# Altium PCB SterUni_V1.PcbDoc
Units mil, origin at the board's own origin, x right, y up, seen from the top; angles counter-clockwise.
Board outline 4448.82 x 3661.42 mil, 2 copper layers (Top Layer, Bottom Layer); 255 components, 211 nets, 795 pads, 11 vias.
Unrouted connection lines stored in the file: 376.
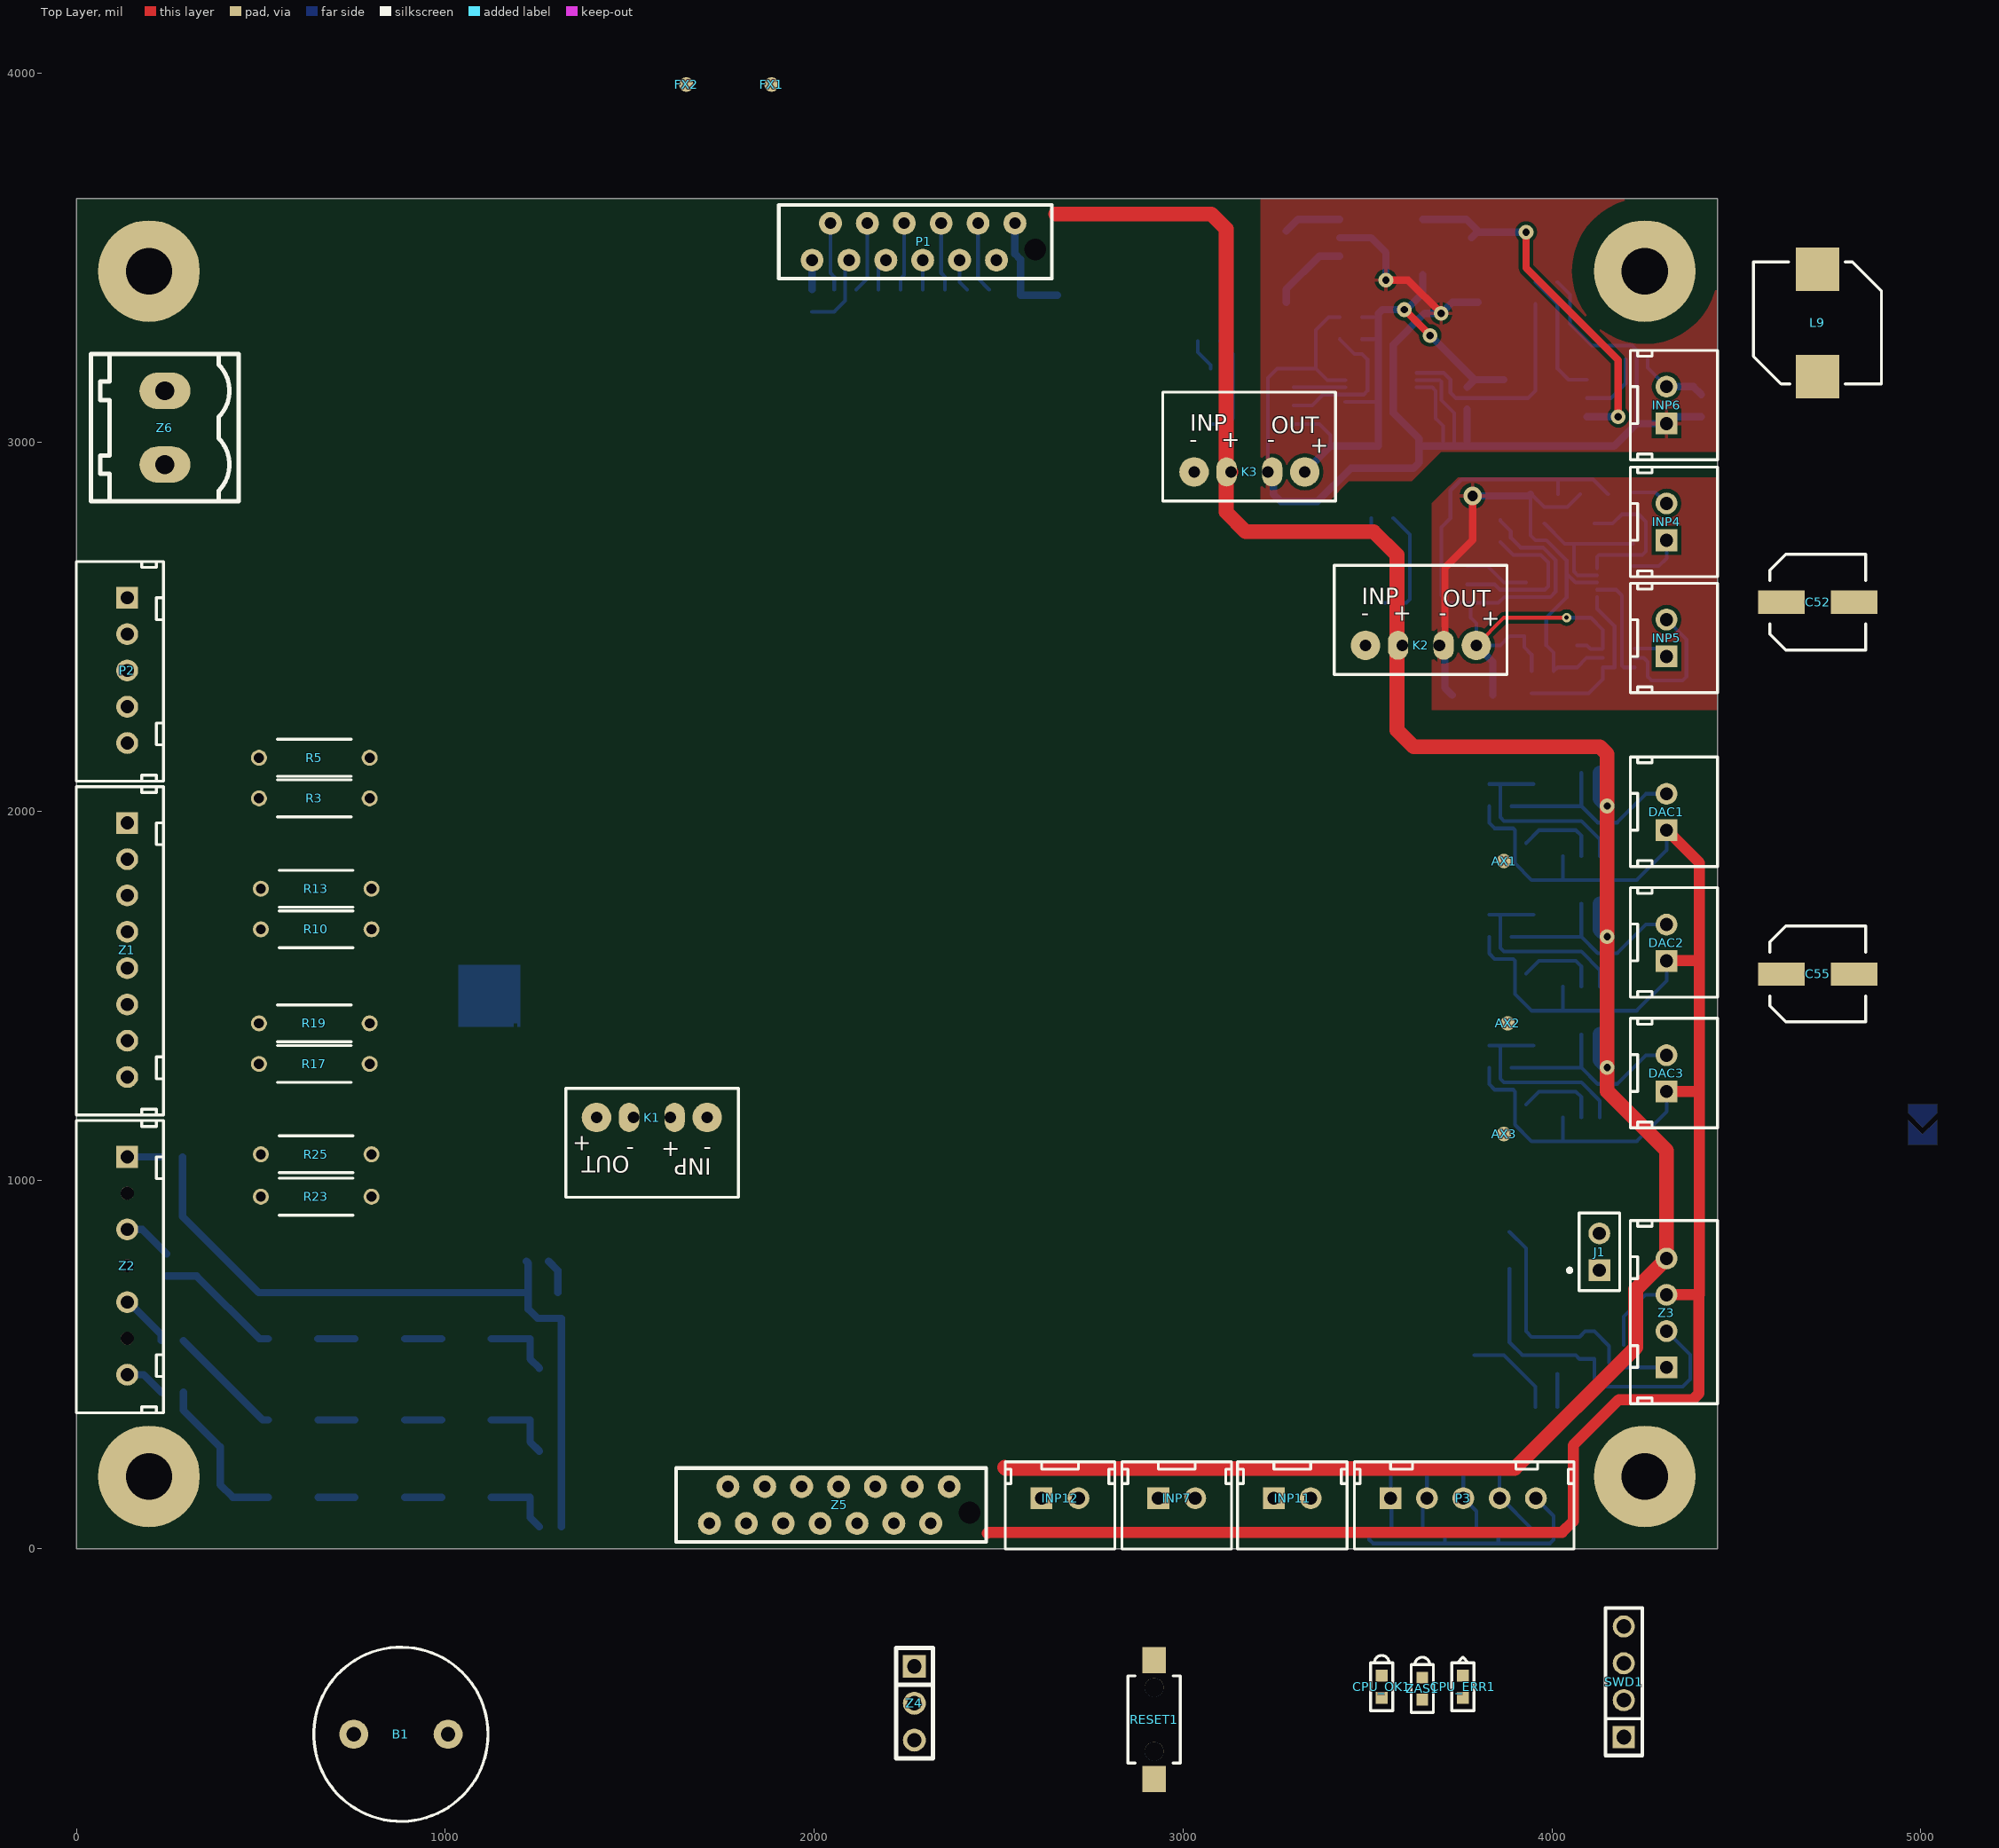
[diagram p0: Top Layer view]
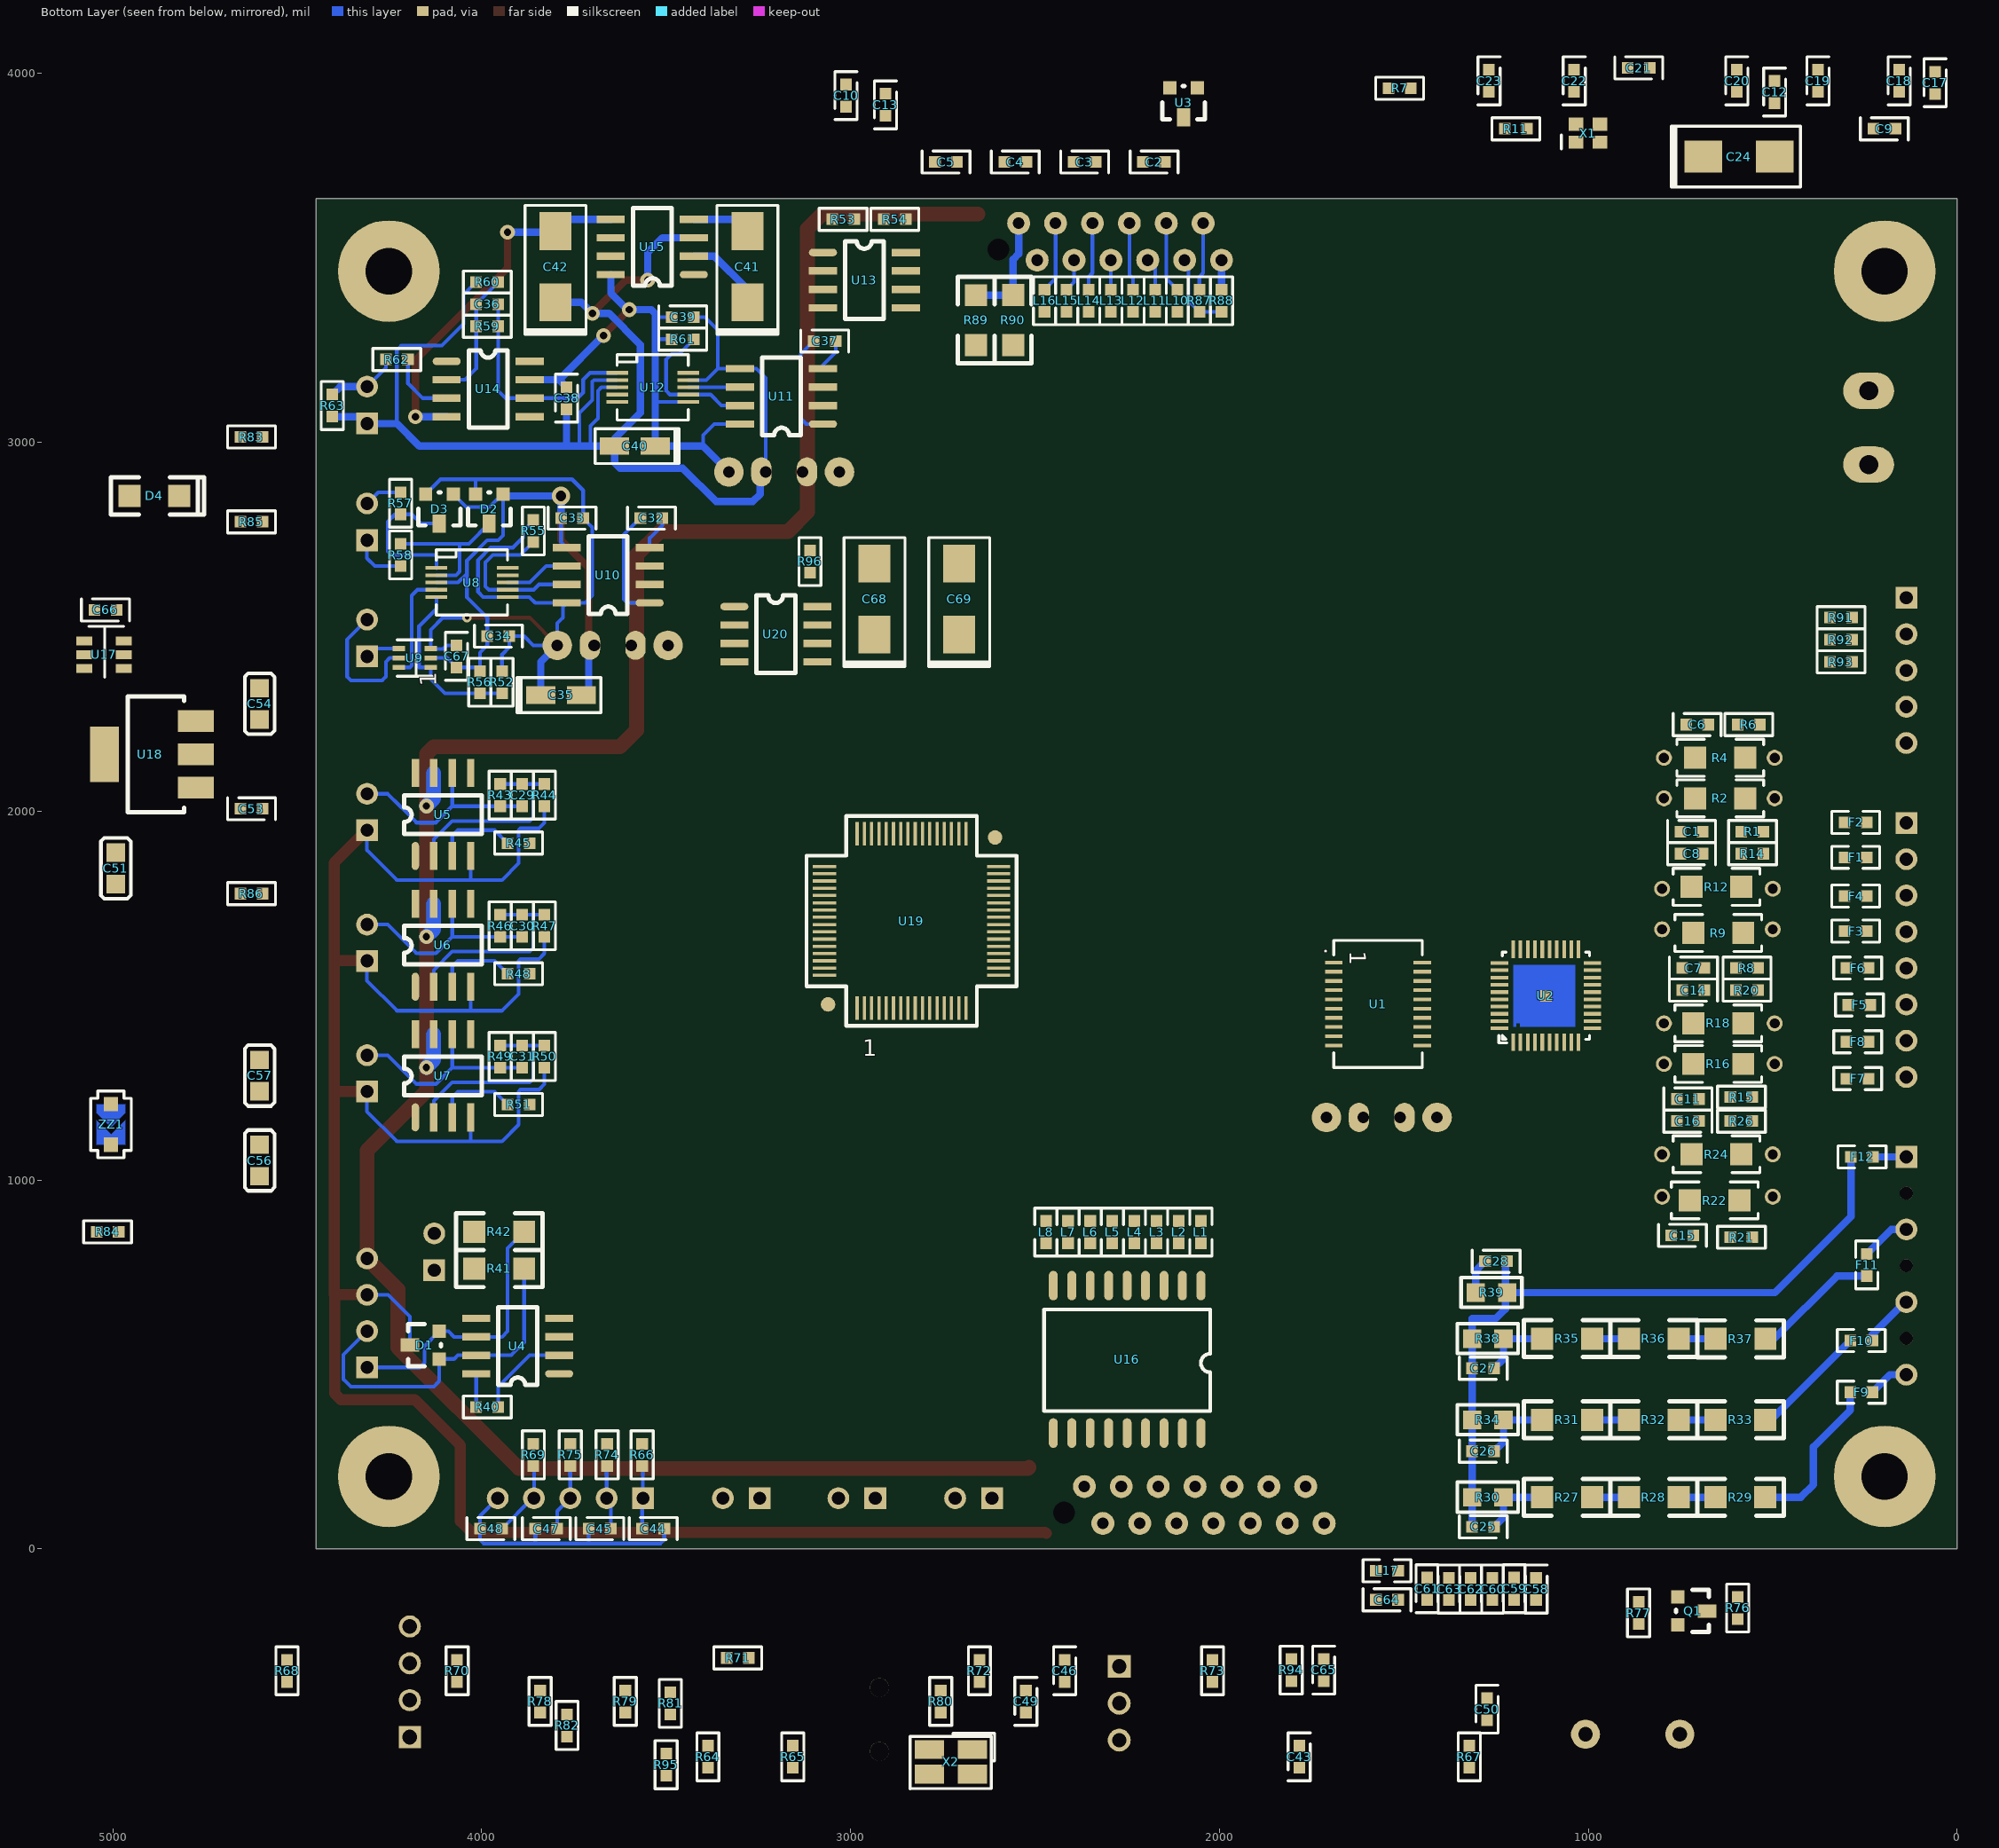
[diagram p1: Bottom Layer view, seen from below]

## Layer stack, top to bottom
Top Layer: signal copper 1.4
Dielectric: dielectric 12.6, FR-4, Dk 4.8
Bottom Layer: signal copper 1.4

## Board outline
0,0 4448.82,0 4448.82,3661.42 0,3661.42

## Design rules (kind name [scope] priority, off if disabled: settings)
Clearance Clear_U1 [InNetClass('Class_U1') vs not(InNetClass('Class_U1'))] p1: gap=45
Clearance Clear_U2 [InNetClass('Class_U2') vs not(InNetClass('Class_U2'))] p2: gap=45
Clearance Clear_U3 [InNetClass('Class_U3') vs not(InNetClass('Class_U3'))] p3: gap=45
Clearance Clear_Izol_2 [InNetClass('Izol_2') vs not(InNetClass('Izol_2'))] p4: gap=60
Clearance Clear_Izol_1 [InNetClass('Izol_1') vs not(InNetClass('Izol_1'))] p5: gap=60
Clearance [All] p6: gap=8
ComponentClearance [All] p1 off: gap=10 collisioncheckmode=3 verticalgap=10 showdistances=FALSE
Height [All] p1 off: minheight=0 maxheight=1000 prefheight=500
HoleSize [All] p1: absolutevalues=TRUE maxlimit=125.98 minlimit=11.81 maxpercent=80.000 minpercent=20.000
MinimumSolderMaskSliver [All] p1: minsoldermaskwidth=4
PolygonConnect [All] p1: connectstyle=Relief reliefconductorwidth=10 reliefentries=4 polygonreliefangle="90 Angle"
RoutingVias [All] p1: holewidth=11.81 width=25 viastyle="Through Hole" minholewidth=11.81 minwidth=25 maxholewidth=100 maxwidth=200
SilkToSilkClearance [All] p1: silktosilkclearance=6
SilkscreenOverComponentPads [All] p1: minsilkscreentomaskgap=6
SolderMaskExpansion [All] p1: expansion=4
Width [All] p1: maxlimit=200 minlimit=8 preferedwidth=10 minimp=50.000000 maximp=50.000000 favimp=50.000000
22 further rules are at their usual default settings.

## Classes and differential pairs
net class Izol_1: _I1_1 _I1_2 CH1+I1 CH1-I1 CH2+I1 GNDI1 NetINP4_1 NetINP4_2 NetINP5_1 NetINP5_2 NetU8_9 NetU8_10 REF2I1 SCLI1 SDAI1 VC5I1
net class Izol_2: _I2_1 _I2_2 _I2_3 _I2_4 _I2_5 _I2_6 _I2_7 _I2_8 _I2_9 GNDI2 NetC36_1 NetC36_2 NetC41_1 NetC41_2 NetINP6_2 NetR62_1 NetU15_1 SCLI2 SDAI2 VC5I2 VM5I2
net class Class_U1: NetF9_1 NetF9_2 NetR28_2
net class Class_U2: NetF10_1 NetR32_2 UL2Z
net class Class_U3: NetF11_1 NetR36_2 UL1Z

## Components (designator, comment, footprint, x,y, rotation, side; value= is the part's Value field where it differs from the comment)
AX1 "" PP_SMD4 3870,1865 r90 top
AX2 "" PP_SMD4 3880,1425 r90 top
AX3 "" PP_SMD4 3870,1125 r90 top
B1 "BMT-1205H09" BMT-1205H09 751.72,-502.41 r0 top
C1 "47nF" 0603C 690,1945 r0 bottom
C2 "4.7uF" 0603C 2207.42,3760.35 r180 bottom
C3 "100nF" 0603C 2395.42,3760.35 r180 bottom
C4 "4.7uF" 0603C 2583.42,3760.35 r180 bottom
C5 "100nF" 0603C 2771.42,3760.35 r180 bottom
C6 "47nF" 0603C 675,2235 r0 bottom
C7 "47nF" 0603C 685,1575 r0 bottom
C8 "47nF" 0603C 690,1885 r0 bottom
C9 "22pF" 0603C 227.42,3850.35 r180 bottom
C10 "22pF" 0603C 3012.42,3970.35 r270 bottom
C11 "47nF" 0603C 700,1220 r0 bottom
C12 "4.7uF" 0603C 495,3980 r270 bottom
C13 "100nF" 0603C 2905.42,3945.35 r270 bottom
C14 "47nF" 0603C 685,1515 r0 bottom
C15 "47nF" 0603C 715,850 r0 bottom
C16 "47nF" 0603C 700,1160 r0 bottom
C17 "100nF" 0603C 60,4005 r270 bottom
C18 "100nF" 0603C 157.42,4010.35 r270 bottom
C19 "100nF" 0603C 377.42,4010.35 r270 bottom
C20 "100nF" 0603C 597.42,4010.35 r270 bottom
C21 "100nF" 0603C 893.42,4015.35 r180 bottom
C22 "100nF" 0603C 1038.42,4010.35 r270 bottom
C23 "100nF" 0603C 1269.42,4010.35 r270 bottom
C24 "100uF/6v3" CAP_C 495,3775 r0 bottom
C25 "22nF" 0603C 1315,60 r180 bottom
C26 "22nF" 0603C 1315,265 r180 bottom
C27 "22nF" 0603C 1315,490 r180 bottom
C28 "22nF" 0603C 1280,780 r180 bottom
C29 "100nF" 0603C 3890,2013.74 r90 bottom
C30 "100nF" 0603C 3890,1659.41 r90 bottom
C31 "100nF" 0603C 3890,1305.08 r90 bottom
C32 "100nF" 0603C 3510,2795 r0 bottom
C33 "100nF" 0603C 3785,2795 r180 bottom
C34 "100nF" 0603C 3985,2475 r180 bottom
C35 "10uF/10V" CAP_A 3729.76,2315 r0 bottom
C36 "100nF" 0603C 4015,3375 r180 bottom
C37 "100nF" 0603C 3040,3275 r0 bottom
C38 "100nF" 0603C 3770,3090 r90 bottom
C39 "100nF" 0603C 3425,3340 r0 bottom
C40 "10uF/10V" CAP_A 3640,2990 r180 bottom
C41 "47uF/10V" CAP_C 3280,3572.91 r270 bottom
C42 "47uF/10V" CAP_C 3800,3572.91 r270 bottom
C43 "100nF" 0603C 1783.7,-533.58 r270 bottom
C44 "10nF" 0603C 3565,55 r180 bottom
C45 "10nF" 0603C 3650,55 r0 bottom
C46 "10nF" 0603C 2419.72,-300.41 r270 bottom
C47 "10nF" 0603C 3795,55 r0 bottom
C48 "10nF" 0603C 3945,55 r0 bottom
C49 "10nF" 0603C 2524.72,-383.41 r270 bottom
C50 "10nF" 0603C 1274.72,-404.41 r270 bottom
C51 "4.7uF" 0805C 4992.17,1887.8 r270 bottom
C52 "100uF/6v3" CAP_SMD_ELEK_D 4622.17,2566.8 r90 top
C53 "22pF" 0603C 4594.17,2006.8 r0 bottom
C54 "4.7uF" 0805C 4602.17,2333.8 r270 bottom
C55 "100uF/6v3" CAP_SMD_ELEK_D 4622.17,1558.8 r90 top
C56 "4.7uF/16V" 0805C 4602.17,1095.8 r270 bottom
C57 "4.7uF/16V" 0805C 4602.17,1325.8 r270 bottom
C58 "100nF" 0603C 1141.73,-78.74 r270 bottom
C59 "100nF" 0603C 1200.79,-77.8 r270 bottom
C60 "100nF" 0603C 1259.84,-78.74 r270 bottom
C61 "100nF" 0603C 1437.01,-77.8 r270 bottom
C62 "100nF" 0603C 1318.9,-78.74 r270 bottom
C63 "100nF" 0603C 1377.95,-78.74 r270 bottom
C64 "100nF" 0603C 1515.75,-137.8 r0 bottom
C65 "10nF" 0603C 1717.48,-298.35 r270 bottom
C66 "100nF" 0603C 4990,2546 r0 bottom
C67 "100nF" 0603C 4068.39,2390 r90 bottom
C68 "47uF/10V" CAP_C 2935.2,2672.05 r270 bottom
C69 "47uF/10V" CAP_C 2705.2,2672.05 r270 bottom
CPU_ERR1 "LED0805" 0603DR 3758.7,-403.58 r90 top
CPU_OK1 "green" 0603DG 3538.7,-403.58 r90 top
D1 "PESD2CANFD24V-TR" SOT23 4202,554 r0 bottom
D2 "BAS70-04" SOT-23 3942,2860 r180 bottom
D3 "BAS70-04" SOT-23 4077,2860 r180 bottom
D4 "CRS14" 1206D 4955,2855 r0 bottom
DAC1 "Header 2" JST-B2B-XH-A 4311.02,1948.82 r90 top
DAC2 "Header 2" JST-B2B-XH-A 4311.02,1594.49 r90 top
DAC3 "Header 2" JST-B2B-XH-A 4311.02,1240.16 r90 top
F1 "BLM18BB141SN1D" 0603L 245,1875 r0 bottom
F2 "BLM18BB141SN1D" 0603L 245,1970 r0 bottom
F3 "BLM18BB141SN1D" 0603L 245,1675 r0 bottom
F4 "BLM18BB141SN1D" 0603L 245,1770 r0 bottom
F5 "BLM18BB141SN1D" 0603L 235,1475 r0 bottom
F6 "BLM18BB141SN1D" 0603L 240,1575 r0 bottom
F7 "BLM18BB141SN1D" 0603L 240,1275 r0 bottom
F8 "BLM18BB141SN1D" 0603L 240,1375 r0 bottom
F9 "BLM18BB141SN1D" 0603L 230,425 r0 bottom
F10 "BLM18BB141SN1D" 0603L 230,565 r0 bottom
F11 "BLM18BB141SN1D" 0603L 245,800 r270 bottom
F12 "BLM18BB141SN1D" 0603L 228,1063 r0 bottom
FX1 "" PP_SMD4 1884.42,3970.35 r90 top
FX2 "" PP_SMD4 1653.42,3970.35 r90 top
INP4 "Header 2" JST-XH-2Y-2.54 4311.02,2734.65 r90 top locked
INP5 "Header 2" JST-XH-2Y-2.54 4311.02,2419.68 r90 top locked
INP6 "Header 2" JST-XH-2Y-2.54 4311.02,3051.18 r90 top locked
INP7 "Header 2" JST-XH-2Y-2.54 2933.07,137.8 r0 top
INP11 "Header 2" JST-XH-2Y-2.54 3246.46,137.8 r0 top
INP12 "Header 2" JST-XH-2Y-2.54 2616.54,137.8 r0 top
J1 "CON2" PIN2 4128.7,755.55 r90 top
K1 "AM2S-1205SZ" DCDC_SIL4 1710,1170 r180 top
K2 "AM2S-1205SZ" DCDC_SIL4 3495,2450 r0 top locked
K3 "AM2S-1205SZ" DCDC_SIL4 3030,2920 r0 top locked
L1 "BLM18PG121SN1D" 0603L 2050.39,889.09 r270 bottom
L2 "BLM18PG121SN1D" 0603L 2110.39,889.09 r270 bottom
L3 "BLM18PG121SN1D" 0603L 2170.39,889.09 r270 bottom
L4 "BLM18PG121SN1D" 0603L 2230.39,889.09 r270 bottom
L5 "BLM18PG121SN1D" 0603L 2290.39,889.09 r270 bottom
L6 "BLM18PG121SN1D" 0603L 2350.39,889.09 r270 bottom
L7 "BLM18PG121SN1D" 0603L 2410.39,889.09 r270 bottom
L8 "BLM18PG121SN1D" 0603L 2470.39,889.09 r270 bottom
L9 "DER0705-10" DER0705_1 4720,3178.66 r90 top
L10 "BLM18PG121SN1D" 0603L 2114.33,3414.25 r270 bottom
L11 "BLM18PG121SN1D" 0603L 2174.33,3354.25 r90 bottom
L12 "BLM18PG121SN1D" 0603L 2234.33,3414.25 r270 bottom
L13 "BLM18PG121SN1D" 0603L 2294.33,3354.25 r90 bottom
L14 "BLM18PG121SN1D" 0603L 2354.33,3414.25 r270 bottom
L15 "BLM18PG121SN1D" 0603L 2414.33,3354.25 r90 bottom
L16 "BLM18PG121SN1D" 0603L 2474.33,3414.25 r270 bottom
L17 "BLM18PG121SN1D" 0603L 1515.75,-59.06 r0 bottom
P1 "Header 6X2" UMATCH-12 1994.33,3494.25 r0 top
P2 "Header 5" JST-B5B-XH-A 137.8,2578.74 r270 top locked
P3 "Header 5" JST-B5B-XH-A 3562.99,137.8 r0 top locked
Q1 "BC817-25" SOT23-3Q 670.72,-169.41 r180 bottom
R1 "1k" 0603R 585,1945 r180 bottom
R2 "100R" 1206RM 575,2035 r180 bottom
R3 "100R" AXIAL_0.25W_1 495,2035 r0 top
R4 "100R" 1206RM 575,2145 r180 bottom
R5 "100R" AXIAL_0.25W_1 495,2145 r0 top
R6 "1k" 0603R 595,2235 r180 bottom
R7 "10k" 0603R 1541.42,3960.35 r180 bottom
R8 "1k" 0603R 600,1575 r180 bottom
R9 "100R" 1206RM 580,1670 r180 bottom
R10 "100R" AXIAL_0.25W_1 500,1680 r0 top
R11 "10k" 0603R 1226.42,3850.35 r180 bottom
R12 "100R" 1206RM 585,1795 r180 bottom
R13 "100R" AXIAL_0.25W_1 500,1790 r0 top
R14 "1k" 0603R 585,1885 r180 bottom
R15 "1k" 0603R 555,1225 r0 bottom
R16 "100R" 1206RM 580,1315 r180 bottom
R17 "100R" AXIAL_0.25W_1 495,1315 r0 top
R18 "100R" 1206RM 580,1425 r180 bottom
R19 "100R" AXIAL_0.25W_1 495,1425 r0 top
R20 "1k" 0603R 600,1515 r180 bottom
R21 "1k" 0603R 615,845 r180 bottom
R22 "100R" 1206RM 590,945 r180 bottom
R23 "100R" AXIAL_0.25W_1 500,955 r0 top
R24 "100R" 1206RM 585,1070 r180 bottom
R25 "100R" AXIAL_0.25W_1 500,1070 r0 top
R26 "1k" 0603R 615,1160 r180 bottom
R27 "270k" 1206 1125.13,140.21 r0 bottom
R28 "270k" 1206 890.13,140.21 r0 bottom
R29 "270k" 1206 655.13,140.21 r0 bottom
R30 "1k" 0805R 1315,140 r180 bottom
R31 "270k" 1206 1125.13,350.21 r0 bottom
R32 "270k" 1206 890.13,350.21 r0 bottom
R33 "270k" 1206 655.13,350.21 r0 bottom
R34 "1k" 0805R 1315,350 r180 bottom
R35 "270k" 1206 1125.13,570.21 r0 bottom
R36 "270k" 1206 890.13,570.21 r0 bottom
R37 "270k" 1206 655,570 r0 bottom
R38 "1k" 0805R 1315,570 r180 bottom
R39 "1k" 0805R 1305,695 r180 bottom
R40 "10k" 0603R 4015,385 r180 bottom
R41 "60R" 1206 4020.13,760.21 r0 bottom
R42 "60R" 1206 3884.87,859.79 r180 bottom
R43 "10k" 0603R 3950,2073.74 r270 bottom
R44 "10k" 0603R 3830,2013.74 r90 bottom
R45 "1k5" 0603R 3870,1913.74 r0 bottom
R46 "10k" 0603R 3950,1719.41 r270 bottom
R47 "10k" 0603R 3830,1659.41 r90 bottom
R48 "1k5" 0603R 3870,1559.41 r0 bottom
R49 "10k" 0603R 3950,1365.08 r270 bottom
R50 "10k" 0603R 3830,1305.08 r90 bottom
R51 "1k5" 0603R 3870,1205.08 r0 bottom
R52 "1k5" 0603R 3945,2320 r90 bottom
R53 "4k7" 0603R 3050,3605 r180 bottom
R54 "4k7" 0603R 2850,3605 r0 bottom
R55 "4k7" 0603R 3860,2730 r90 bottom
R56 "1k5" 0603R 4005,2320 r90 bottom
R57 "1k5" 0603R 4220,2805 r90 bottom
R58 "1k5" 0603R 4220,2725 r270 bottom
R59 "47k" 0603R 3955,3315 r0 bottom
R60 "1k5" 0603R 3955,3435 r0 bottom
R61 "4k7" 0603R 3425,3280 r0 bottom
R62 "1k5" 0603R 4200,3225 r0 bottom
R63 "100R" 0603R 4405,3070 r90 bottom
R64 "10k" 0603R 3386.7,-533.58 r270 bottom
R65 "33R" 0603R 3156.7,-533.58 r270 bottom
R66 "4k7" 0603R 3565,225 r90 bottom
R67 "10k" 0603R 1322.7,-533.58 r270 bottom
R68 "10k" 0603R 4527.72,-300.41 r270 bottom
R69 "4k7" 0603R 3860,225 r90 bottom
R70 "10k" 0603R 4066.72,-300.41 r270 bottom
R71 "10k" 0603R 3335.72,-295.41 r180 bottom
R72 "33R" 0603R 2650.72,-300.41 r270 bottom
R73 "33R" 0603R 2018.72,-300.41 r270 bottom
R74 "4k7" 0603R 3660,225 r90 bottom
R75 "4k7" 0603R 3760,225 r90 bottom
R76 "100R" 0603R 595,-130 r270 bottom
R77 "4k7" 0603R 863.72,-143.41 r270 bottom
R78 "4k7" 0603R 3841.72,-383.41 r270 bottom
R79 "4k7" 0603R 3610.72,-383.41 r270 bottom
R80 "4k7" 0603R 2755.72,-383.41 r270 bottom
R81 "4k7" 0603R 3488.7,-388.58 r270 bottom
R82 "4k7" 0603R 3768.7,-448.58 r270 bottom
R83 "500k" 0603R 4594.17,3014.8 r0 bottom
R84 "100k" 0603R 4984.17,859.8 r0 bottom
R85 "100k" 0603R 4594.17,2784.8 r0 bottom
R86 "22k" 0603R 4594.17,1776.8 r0 bottom
R87 "4k7" 0603R 2054.33,3354.25 r90 bottom
R88 "4k7" 0603R 1994.33,3354.25 r90 bottom
R89 "8R" 1206 2659.33,3399.25 r90 bottom
R90 "8R" 1206 2559.12,3399.38 r90 bottom
R91 "33R" 0603R 285,2525 r0 bottom
R92 "33R" 0603R 285,2465 r0 bottom
R93 "33R" 0603R 285,2405 r0 bottom
R94 "4k7" 0603R 1805.35,-298.35 r270 bottom
R95 "4k7" 0603R 3500,-555 r270 bottom
R96 "DNP/0R" 0603R 3110.2,2707.05 r270 bottom
RESET1 "SW-PB" DTSM31N_2 2921.72,-462.41 r0 top
SWD1 "NCDW-04" PIN4 4195,-510 r90 top
U1 "ADUM7642" RQ-20 1690,1590 r270 bottom
U2 "ADE7880ACPZ" LFCSP_WQ40 1115,1500 r90 bottom
U3 "MCP1703T-3302E/CB" SOT-23 2059.42,3961.35 r180 bottom
U4 "MCP2551" SO8 3790,475 r0 bottom
U5 "OPA197IDR" SO8 4180,1878.74 r90 bottom
U6 "OPA197IDR" SO8 4180,1524.41 r90 bottom
U7 "OPA197IDR" SO8 4180,1170.08 r90 bottom
U8 "MCP3423-E/UN" MSOP10_1 4122.91,2659.68 r270 bottom
U9 "INA199A3" SC70-6 4138.39,2390 r90 bottom
U10 "ADuM1251" SO8 3545,2565 r0 bottom
U11 "ADuM1251" SO8 3075,3050 r0 bottom
U12 "MCP3423-E/UN" MSOP10_1 3632.91,3188.74 r270 bottom
U13 "FM24CL64B-GTR" SO8 3075,3515 r180 bottom
U14 "OPA197IDR" SO8 4095,3220 r180 bottom
U15 "ICL7660SCBAZ-T" SO8 3425,3455 r0 bottom
U16 "ULN2803A-SMD" SOL18 2050.39,714.09 r0 bottom
U17 "TPS54302" SOT-23-1.1 5077.17,2461.85 r270 bottom
U18 "TLV1117LV33DCYR" SOT223 4775,2154.45 r270 bottom
U19 "STM32G474RET" LQFP64 2982.28,1466.54 r180 bottom
U20 "ICL7660SCBAZ-T" SO8 3315,2555 r180 bottom
X1 "16.384MHz" XTAL_2.5_2 1033.76,3814.35 r180 bottom
X2 "ISM97-3251BH25.00" GEN_SMD1_1 2669.41,-543.58 r180 bottom
Z1 "Header 8H" JST-B8B-XH-A 137.8,1968.5 r270 top locked
Z2 "Header 7" JST-B7B-XH-A 137.8,1062.99 r270 top locked
Z3 "Header 4" JST-B4B-XH-A 4311.02,492.13 r90 top locked
Z4 "Header 3" PIN3 2271.72,-318.41 r90 top
Z5 "Header 14" UMATCH-14 1716.14,69.29 r0 top
Z6 "CON2" ARC-2-5.08 240,3140 r270 top
ZAS1 "green" 0603DG 3648.7,-408.58 r90 top
ZZ1 "ZWORA" ZW3 5005.17,1206.03 r270 bottom

## Footprints (in the part's own frame and the unit in brackets; to place one, negate y for a bottom-side part, rotate by r counter-clockwise, add the part's x,y. Pads: shape width x height; smd on the part's side, far side on the other; paste and mask are expansions set on the pad)
0603C [mm]
  rect 0.8x0.8 smd: 1(0,0) 2(1.524,0)
  silkscreen extent -0.89,-0.76 2.41,0.76
0603DG [mm]
  rect 0.8x0.8 smd: A(1.524,0) K(0,0)
  silkscreen extent -0.89,-0.76 2.92,0.76
0603DR [mm]
  rect 0.8x0.8 smd: A(1.524,0) K(0,0)
  silkscreen extent -0.89,-0.76 2.79,0.76
0603L [mm]
  rect 0.8x0.8 smd: 1(0,0) 2(1.524,0)
  silkscreen extent -0.89,-0.76 2.41,0.76
0603R [mm]
  rect 0.8x0.8 smd: 1(0,0) 2(1.524,0)
  silkscreen extent -0.89,-0.76 2.41,0.76
0805C [mil]
  rect 50x50 smd: 1(0,0) 2(85,0)
  silkscreen extent -40,-40 125,41
0805R [mil]
  rect 50x50 smd: 1(0,0) 2(85,0)
  silkscreen extent -40,-40 125,41
1206 [mil]
  rect 60x60 smd: 1(-0.13,0.21) 2(-135.13,0.21)
  silkscreen extent -185,-50 50,50
1206D [mil]
  rect 60x60 smd: A(0,0) K(-135,0)
  silkscreen extent -202,-50 50,50
1206RM [mil]
  rect 60x60 smd: 1(0,0) 2(-135,0)
  silkscreen extent -185,-50 50,50
ARC-2-5.08 [mm]
  oval 2.5x3.5 hole 1.3: 1(0,0) 2(5.08,0)
  silkscreen extent -2.54,-5.08 7.62,5.08
AXIAL_0.25W_1 [mm]
  round 1.1 hole 0.7 mask+0.102: 1(0,0) 2(7.62,0)
  silkscreen extent 1.27,-1.27 6.35,1.27
BMT-1205H09 [mm]
  round 2 hole 1: 1(0,0) 2(6.5,0)
  silkscreen extent -2.75,-6 9.25,6
CAP_A [mm]
  rect 2x1.2 smd: 1(0,0) 2(2.8,0)
  silkscreen extent -1.34,-1.2 4.45,1.2
CAP_C [mm]
  rect 2.6x2.2 smd: 1(0,0) 2(4.9,0)
  silkscreen extent -1.78,-2.1 7.11,2.1
CAP_SMD_ELEK_D [mm]
  rect 1.6x3.2 smd mask+0.102: 1(0,-5) 2(0,0)
  silkscreen extent -3.3,-5.8 3.3,0.8
DCDC_SIL4 [mm]
  round 2.032 hole 0.8: 1(0,0) 4(7.62,0)
  oval 1.4x2 hole 0.8 copper offset -0.3,0: 2(2.54,0)
  oval 1.4x2 hole 0.8 copper offset 0.3,0: 3(5.08,0)
  silkscreen extent -2.16,-2 9.74,5.5
DER0705_1 [mm]
  rect 3x3 smd: 1(0,0) 2(7.4,0)
  silkscreen extent -0.5,-4.4 7.9,4.4
DTSM31N_2 [mm]
  round 1.3 hole 1.3 mask+0: 0(0,-2.2) 0(0,2.2)
  rect 1.6x1.8 smd: 1(0,4.1) 2(0,-4.1)
  silkscreen extent -1.8,-3 1.8,3
GEN_SMD1_1 [mm]
  rect 2x1.3 smd: 1(0,0) 2(-2.972,0) 3(-2.972,-1.702) 4(0,-1.702)
  silkscreen extent -4.3,-2.7 1.52,1.12
JST-B2B-XH-A [mm] "Connector; Header; 4 Position"
  rect 1.5x1.5 hole 0.9: 1(0,0)
  round 1.5 hole 0.9: 2(2.5,0)
  silkscreen extent -2.5,-3.5 5.04,2.5
JST-B4B-XH-A [mm] "Connector; Header; 4 Position"
  rect 1.5x1.5 hole 0.9: 1(0,0)
  round 1.5 hole 0.9: 2(2.5,0) 3(5,0) 4(7.5,0)
  silkscreen extent -2.5,-3.5 10.12,2.5
JST-B5B-XH-A [mm] "Connector; Header; 4 Position"
  rect 1.5x1.5 hole 0.9: 1(0,0)
  round 1.5 hole 0.9: 2(2.5,0) 3(5,0) 4(7.5,0) 5(10,0)
  silkscreen extent -2.5,-3.5 12.62,2.5
JST-B7B-XH-A [mm] "Connector; Header; 4 Position"
  rect 1.5x1.5 hole 0.9: 1(0,0)
  round 0.9 hole 0.9: 2(2.5,0) 4(7.5,0) 6(12.5,0)
  round 1.5 hole 0.9: 3(5,0) 5(10,0) 7(15,0)
  silkscreen extent -2.5,-3.5 17.62,2.5
JST-B8B-XH-A [mm] "Connector; Header; 4 Position"
  rect 1.5x1.5 hole 0.9: 1(0,0)
  round 1.5 hole 0.9: 2(2.5,0) 3(5,0) 4(7.5,0) 5(10,0) 6(12.5,0) 7(15,0) 8(17.5,0)
  silkscreen extent -2.5,-3.5 20.12,2.5
JST-XH-2Y-2.54 [mm] "Connector; Header; 4 Position"
  rect 1.5x1.5 hole 0.9: 1(0,0)
  round 1.5 hole 0.9: 2(2.54,0)
  silkscreen extent -2.5,-3.5 5.04,2.5
LFCSP_WQ40 [mm]
  rect 1.2x0.25 smd mask+0.14: 1(-3.2,2.25) 2(-3.2,1.75) 3(-3.2,1.25) 4(-3.2,0.75) 5(-3.2,0.25) 6(-3.2,-0.25) 7(-3.2,-0.75) 8(-3.2,-1.25) 9(-3.2,-1.75) 10(-3.2,-2.25) 21(3.2,-2.25) 22(3.2,-1.75) 23(3.2,-1.25) 24(3.2,-0.75) 25(3.2,-0.25) 26(3.2,0.25) 27(3.2,0.75) 28(3.2,1.25) 29(3.2,1.75) 30(3.2,2.25)
  rect 0.25x1.2 smd mask+0.14: 11(-2.25,-3.2) 12(-1.75,-3.2) 13(-1.25,-3.2) 14(-0.75,-3.2) 15(-0.25,-3.2) 16(0.25,-3.2) 17(0.75,-3.2) 18(1.25,-3.2) 19(1.75,-3.2) 20(2.25,-3.2) 31(2.25,3.2) 32(1.75,3.2) 33(1.25,3.2) 34(0.75,3.2) 35(0.25,3.2) 36(-0.25,3.2) 37(-0.75,3.2) 38(-1.25,3.2) 39(-1.75,3.2) 40(-2.25,3.2)
  rect 0.8x0.8 smd mask+0.1: EXP(0,0)
  Top Layer region: -2.125,-2.025 2.125,-2.025 2.125,2.225 -2.125,2.225 -2.125,2.05 -1.9,2.05 -1.9,1.775 -2.125,1.775
  silkscreen extent -3.25,-3 3,3.25
LQFP64 [mm]
  rect 0.22x1.6 smd mask+0.152: 1(0,0) 2(0.5,0) 3(1,0) 4(1.5,0) 5(2,0) 6(2.5,0) 7(3,0) 8(3.5,0) 9(4,0) 10(4.5,0) 11(5,0) 12(5.5,0) 13(6,0) 14(6.5,0) 15(7,0) 16(7.5,0) 33(7.5,12) 34(7,12) 35(6.5,12) 36(6,12) 37(5.5,12) 38(5,12) 39(4.5,12) 40(4,12) 41(3.5,12) 42(3,12) 43(2.5,12) 44(2,12) 45(1.5,12) 46(1,12) 47(0.5,12) 48(0,12)
  rect 1.6x0.22 smd mask+0.152: 17(9.75,2.25) 18(9.75,2.75) 19(9.75,3.25) 20(9.75,3.75) 21(9.75,4.25) 22(9.75,4.75) 23(9.75,5.25) 24(9.75,5.75) 25(9.75,6.25) 26(9.75,6.75) 27(9.75,7.25) 28(9.75,7.75) 29(9.75,8.25) 30(9.75,8.75) 31(9.75,9.25) 32(9.75,9.75) 49(-2.25,9.75) 50(-2.25,9.25) 51(-2.25,8.75) 52(-2.25,8.25) 53(-2.25,7.75) 54(-2.25,7.25) 55(-2.25,6.75) 56(-2.25,6.25) 57(-2.25,5.75) 58(-2.25,5.25) 59(-2.25,4.75) 60(-2.25,4.25) 61(-2.25,3.75) 62(-2.25,3.25) 63(-2.25,2.75) 64(-2.25,2.25)
  round 1 smd mask+0.5: ""(-2,0.25) ""(9.5,11.75)
  silkscreen extent -3.47,-1.22 10.97,13.23
MSOP10_1 [mm]
  rect 0.25x1.5 smd mask+0.152: 1(0,0) 2(0.5,0) 3(1,0) 4(1.5,0) 5(2,0) 6(2,4.9) 7(1.5,4.9) 8(1,4.9) 9(0.5,4.9) 10(0,4.9)
  silkscreen extent -1.25,0 3.25,4.9
PIN2 [mm] "Photosensitive Diode; 2 Leads"
  rect 1.5x1.5 hole 0.9: 1(0,0)
  round 1.5 hole 0.9: 2(2.54,0)
  silkscreen extent -1.4,-1.4 3.94,2.17
PIN3 [mil]
  rect 62x62 hole 39.37: 1(0,0)
  round 62 hole 39.37: 2(-100,0) 3(-200,0)
  silkscreen extent -250,-50 50,50
PIN4 [mil]
  rect 60x60 hole 40: 1(0,0)
  round 60 hole 40: 2(100,0) 3(200,0) 4(300,0)
  silkscreen extent -50,-50 350,50
PP_SMD4 [mm]
  round 1 smd: 1(0,0)
RQ-20 [mil]
  rect 10x47.24 smd: 1(0,0) 2(25,0) 3(50,0) 4(75,0) 5(100,0) 6(125,0) 7(150,0) 8(175,0) 9(200,0) 10(225,0) 11(225,240) 12(200,240) 13(175,240) 14(150,240) 15(125,240) 16(100,240) 17(75,240) 18(50,240) 19(25,240) 20(0,240)
  silkscreen extent -60,0 285,240
SC70-6 [mm]
  rect 0.35x0.85 smd mask+0.152: 1(0,0) 2(0.65,0) 3(1.3,0) 4(1.3,2.2) 5(0.65,2.2) 6(0,2.2)
  silkscreen extent -0.6,-0.1 1.9,2.3
SO8 [mil]
  oval 76x20 smd: 1(0,0)
  rect 76x20 smd: 2(0,-50) 3(0,-100) 4(0,-150) 5(225,-150) 6(225,-100) 7(225,-50) 8(225,0)
  silkscreen extent 60,-180 165,30
SOL18 [mil]
  oval 24x80 smd: 1(0,0) 2(50,0) 3(100,0) 4(150,0) 5(200,0) 6(250,0) 7(300,0) 8(350,0) 9(400,0) 10(400,400) 11(350,400) 12(300,400) 13(250,400) 14(200,400) 15(150,400) 16(100,400) 17(50,400) 18(0,400)
  silkscreen extent -25,65 425,340
SOT23 [mil]
  rect 36x36 smd: 1(-87,39) 2(-87,-36)
  rect 50x36 smd: 3(-7,1)
  silkscreen extent -92,-56 -2,59
SOT23-3Q [mil]
  rect 36x36 smd: B(-87,39) E(-87,-36)
  rect 50x36 smd: C(-7,1)
  silkscreen extent -92,-56 -2,59
SOT223 [mm]
  rect 1.5x2.5 smd: 1(2.3,0) 2(0,0) 3(-2.3,0)
  rect 3.8x2 smd: 4(0,-6.3)
  silkscreen extent -4,-4.7 4,-0.8
SOT-23 [mil]
  rect 36x36 smd: 1(0,0) 2(-75,0)
  rect 36x50 smd: 3(-38,-80)
  silkscreen extent -95,-85 20,5
SOT-23-1.1 [mm]
  rect 0.6x1.1 smd: 1(0,0) 2(0.95,0) 3(1.9,0) 4(1.9,2.7) 5(0.95,2.7) 6(0,2.7)
  silkscreen extent -1,0.3 2.5,2.7
UMATCH-12 [mil]
  round 50 hole 59.06: 0(605.12,29.13)
  round 62 hole 31.5: 1(0,0) 2(50,100) 3(100,0) 4(150,100) 5(200,0) 6(250,100) 7(300,0) 8(350,100) 9(400,0) 10(450,100) 11(500,0) 12(550,100)
  silkscreen extent -90,-50 650,150
UMATCH-14 [mil]
  round 50 hole 59.06: 0(705.12,29.13)
  round 62 hole 31.5: 1(0,0) 2(50,100) 3(100,0) 4(150,100) 5(200,0) 6(250,100) 7(300,0) 8(350,100) 9(400,0) 10(450,100) 11(500,0) 12(550,100) 13(600,0) 14(650,100)
  silkscreen extent -90,-50 750,150
XTAL_2.5_2 [mm]
  rect 1x0.9 smd mask+0.102: 1(0,0) 2(1.65,0) 3(1.65,1.225) 4(0,1.225)
  silkscreen extent -1,-0.48 -1,0.5
ZW3 [mm]
  rect 1x1 smd: 1(0,0) 2(2.8,0)
  Top Layer region: 2.1,0 1.1,-1 2.8,-1 2.8,1 1.1,1
  Top Layer region: 1.6,0 0.6,1 0,1 0,-1 0.6,-1
  silkscreen extent -0.9,-1.4 3.7,1.4

## Part data
AX1 AX2 AX3 FX1 FX2: library part PP_RT
B1: library part BUZZER
C1 C6 C7 C8 C9 C10 C11 C14 C15 C16 C25 C26 C27 C28 C44 C45 C46 C47 C48 C49 C50 C58 C59 C60 C61 C62 C63 C64 C65: library part CAP, "Capacitor"
C2 C3 C4 C5 C12 C13 C17 C18 C19 C20 C21 C22 C23 C51 C53 C54 C56 C57 C66: library part CAP
C24 C35 C40 C41 C42 C68 C69: library part CapTantal
C29 C30 C31 C32 C33 C34 C36 C37 C38 C39 C43 C67: library part Cap_100nF_X7R_10%_0402, "Capacitor,100nF,16V,X7R,10%,0402,YAGEO"
C52 C55: library part CapTantal, "EEEFK0J101AP"
CPU_ERR1 CPU_OK1 ZAS1: library part LED1206
D4: library part "DIODE SCHOTTKY", "Schottky Diode"
DAC1 DAC2 DAC3 INP4 INP5 INP6 INP7 INP11 INP12: "Header, 2-Pin"
F1 F2 F3 F4 F5 F6 F7 F8 F9 F10 F11 F12: library part KORALIK, "Koralik ferrytowy"
J1 Z6: "Connector"
K1 K2 K3: library part DCDC_SIL
L1 L2 L3 L4 L5 L6 L7 L8 L10 L11 L12 L13 L14 L15 L16 L17: library part BEAD_120R_2A_0603, "Bead,120R,2A,0603,BLM18PG121SN1D,MURATA"
L9: library part CEWKA_1
P1: "Header, 6-Pin, Dual row"
P2 P3: "Header, 5-Pin"
Q1: library part S9013SMD
R1 R2 R3 R4 R5 R6 R7 R8 R9 R10 R11 R12 R13 R14 R15 R16 R17 R18 R19 R20 R21 R22 R23 R24 R25 R26 R27 R28 R29 R30 R31 R32 R33 R34 R35 R36 R37 R38 R39 R40 R41 R42 R43 R44 R45 R46 R47 R48 R49 R50 R51 R52 R53 R54 R55 R56 R57 R58 R59 R60 R61 R62 R63 R64 R65 R66 R67 R68 R69 R70 R71 R72 R73 R74 R75 R76 R77 R78 R79 R80 R81 R82 R83 R84 R85 R86 R87 R88 R89 R90 R91 R92 R93 R94 R95: library part RES3
R96: library part RES3Z
SWD1: library part SW_CON, "Header, 4-Pin"
U1: "ADuM7642"
U2: library part ADE7880
U5 U6 U7 U14: library part "Op Amp", "FET Operational Amplifier"
U8 U12: library part MCP3423
U9: library part INA199
U10 U11: "ADuM1251ARZ"
U13: library part AT24C02
U15 U20: library part ICL7660
U16: library part ULN2803
U18: library part LD1117V33
U19: library part STM32FG474RET
X1: library part XTAL_32K_NX3215SA, "Crystal 32.768kHz, 6pF, -+20PPM, R=50K, SMD"
X2: library part OSC_25M_NZ2520SB, "Oscillator 25.00Mhz, -+50PPM, 3.3V, Temp -55 to +125°C"
Z1: "Header, 8-Pin, Right Angle"
Z2: "Header, 7-Pin"
Z3: "Header, 4-Pin"
Z4: "Header, 3-Pin"
Z5: "Header, 14-Pin"

## Free pads (board coordinates)
  round 275.59 hole 125.98 mask+4: 0(196.85,196.85) 0(196.85,3464.57) 0(4251.97,196.85) 0(4251.97,3464.57)

## Via types
v1: diameter 40, hole 20, Top Layer to Bottom Layer, 9 vias
v2: diameter 50, hole 28, Top Layer to Bottom Layer, 1 vias
v3: diameter 25, hole 12, Top Layer to Bottom Layer, 1 vias

## Nets (pads, with @x,y where several pads share a name; then routed paths per layer and width w, separated by ;. In a path a pad name is that pad's centre, name@x,y a point inside that pad or via, vN(x,y) a via of type N, cw(c..) or ccw(c..) an arc to the next point about the centre after c; other vN are vias at no path point)
#RESET_I: U1.12 U2.4
#REVP_I: U2.33
/RST: C46.1 R70.2 RESET1.2 U19.7
_I1_1: U8.9
_I1_2: U8.10
_I2_1: U14.8
_I2_2: U14.1
_I2_3: U14.5
_I2_4: U12.4
_I2_5: U12.5
_I2_6: U15.7
_I2_7: U15.6
_I2_8: U12.10
_I2_9: U15.1
AI_CS: U1.5 U19.55
AI_IRQ0: U1.6 U19.54
AI_MISO: U1.8 U19.57
AI_MOSI: U1.4 U19.58
AI_RESET: U1.9 U19.39
AI_SCLK: U1.3 U19.56
BUZZER: R77.2 U19.44
C2L1+: F7.1 Z1.8
C2L1-: F8.1 Z1.7
C2L2+: F5.1 Z1.6
C2L2-: F6.1 Z1.5
C2L3+: F3.1 Z1.4
C2L3-: F4.1 Z1.3
C2LZ+: F1.1 Z1.2
C2LZ-: F2.1 Z1.1
CAN_RX: U4.4 U19.61
CAN_TX: U4.1 U19.62
CANH: D1.1 R41.2 U4.7 Z3.2 | length 940.2
  Bottom Layer w10: R41.2 3885,560 3920,525 U4.7 4065,525 4075,515 D1.1 4115,455 4130,440 4355,440 4375,460 4375,526.57 Z3.2
CANL: D1.2 R42.1 U4.6 Z3.1 | length 749
  Bottom Layer w10: R42.1 3930,815 3930,590 3945,575 U4.6 4075,575 4090,590 D1.2 4155,550 4155,505 4167.87,492.13 Z3.1
CH1+I1: D3.3 R57.1 U8.1 | length 407.3
  Bottom Layer w10: D3.3 4165,2780 4190,2805 R57.1 4235,2805 4255,2785 4255,2705 4245,2695 4127.91,2695 4122.91,2690 U8.1
CH1-I1: D2.3 R58.1 U8.2 | length 404.8
  Bottom Layer w10: D2.3 4035,2725 4060,2725 ; U8.2 4070,2640 4060,2650 4060,2725 ; R58.1 4060,2725
CH2+I1: U8.4 U9.6 | length 300.6
  Bottom Layer w10: U8.4 4174.37,2600.63 4190,2585 4190,2395 4195,2390 U9.6
CS_I: U1.16 U2.39
CZAS_GATE: R91.2 U19.37
CZAS_WE: R92.2 U19.35
CZAS_WY: R93.2 U19.34
D_RXD: R73.2 U19.60
D_TXD: R72.2 U19.59
DAC1_1: AX1.1 R45.1 U19.18
DAC1_2: AX2.1 R48.1 U19.19
DAC2: AX3.1 R51.1 U19.20
GND: C32.1 C37.1 C43.1 C44.2 C45.2 C46.2 C47.2 C48.2 C49.2 C50.2 C51.1 C52.1 C53.1 C54.1 C55.1 C56.1 C57.1 C58.2 C59.2 C60.2 C61.2 C62.2 C63.2 C64.2 C65.2 C69.2 D1.3 DAC1.1 DAC2.1 DAC3.1 INP7.1 INP11.1 INP12.1 K1.1 K2.1 K3.1 P1.1 P2.2 P3.5 Q1.E R40.2 R44.1 R47.1 R50.1 R68.1 R78.2 R85.2 R86.2 R88.2 R89.2 R90.2 R95.2 R96.1 RESET1.1 SWD1.2 U1.2 U1.10 U4.2 U10.4 U11.4 U13.1 U13.2 U13.3 U13.4 U16.9 U17.1 U18.1 U19.15 U19.27 U19.31 U19.47 U19.63 U20.3 X2.2 Z3.3 Z4.1 Z5.3 Z5.4 Z6.2 | length 7911.8
  Top Layer w30: 2470,42 2473,45 4028,45 4058,75 4058,281 4182,405 4382,405 4398.98,421.98 4398.98,688.98 ; Z3.3 4398.98,688.98 ; DAC3.1 4311.18,1240 4400,1240 ; DAC2.1 4311.54,1595 4400,1595 ; DAC1.1 4400,1859.84 4400,1595 ; 4398.98,688.98 4400,690 4400,1240 ; 4400,1240 4400,1595
  Bottom Layer w10: C37.1 3040,3245 3075,3210 U11.4 ; C44.2 3505,25 3515,15 3710,15 ; C32.1 3510,2775 3545,2740 U10.4 ; C45.2 3710,15 ; U4.2 3870,525 3955,440 R40.2 ; R50.1 3830,1260.08 3845,1245.08 3895,1245.08 3900,1240.08 3900,1150.08 3945,1105.08 4030,1105.08 ; R47.1 3830,1614.41 3845,1599.41 3895,1599.41 3900,1594.41 3900,1504.41 3945,1459.41 4030,1459.41 ; R44.1 3830,1968.74 3845,1953.74 3895,1953.74 3900,1948.74 3900,1858.74 3945,1813.74 4030,1813.74 ; C47.2 3855,15 ; P3.5 4005,89.49 C48.2 4005,25 3995,15 3855,15 ; 4030,1170.08 4030,1105.08 ; 4030,1524.41 4030,1459.41 ; 4030,1878.74 4030,1813.74 ; D1.3 4195,630 4253.98,688.98 Z3.3 ; DAC3.1 4311.02,1186.1 4230,1105.08 4030,1105.08 ; DAC2.1 4311.02,1540.43 4230,1459.41 4030,1459.41 ; DAC1.1 4311.02,1894.76 4230,1813.74 4030,1813.74 ; 3710,15 3855,15
  Bottom Layer w20: R88.2 P1.1
GND_I: C1.2 C2.1 C3.1 C4.1 C5.1 C6.2 C7.2 C8.2 C9.1 C10.1 C11.2 C12.1 C13.1 C14.2 C15.2 C16.2 C17.1 C18.1 C19.1 C20.1 C21.1 C22.1 C23.1 C24.1 C28.1 K1.3 R2.2 R3.2 R4.2 R5.2 R9.2 R10.2 R12.2 R13.2 R16.2 R17.2 R18.2 R19.2 R22.2 R23.2 R24.2 R25.2 R39.1 U1.11 U1.19 U2.3 U2.6 U2.25 U2.EXP U3.1 | length 95.4
  Bottom Layer w20: C28.1 1305,755 R39.1
GNDI1: C33.1 C34.1 C35.1 C67.1 D2.1 D3.1 K2.3 R56.2 U8.3 U9.2 U10.5 | length 1869.3
  Top Layer w20: K2.3 3695,2455 3710,2470 3710,2660 3785,2735 v2(3785,2855)
  Bottom Layer w10: U10.5 3785,2730 C33.1 ; D2.1 3942,2748 3955,2735 3985,2735 4040,2680 4040,2644.54 ; D2.1@3944,2860 3979,2825 4042,2825 D3.1 ; U8.3 4064.23,2620.31 4040,2644.54 ; U9.2 4093.98,2415.59 C67.1 4015,2390 R56.2 4005,2430 3985,2450 C34.1 3985,2525 4040,2580 4040,2644.54
  Bottom Layer w20: K2.3 3710,2435 3710,2334.76 C35.1 ; C33.1 v2(3785,2855) 3937,2855 D2.1
GNDI2: C38.1 C39.1 C40.1 C42.2 INP6.1 K3.3 R60.2 R63.1 U11.5 U12.2 U12.3 U12.9 U15.3 | length 4124.1
  Top Layer w20: v1(3550,3440) 3610,3440 v1(3700,3350)
  Bottom Layer w10: K3.3 3230,3175 3255,3200 U11.5 3360,3200 ; C39.1 3395,3340 3360,3305 3360,3200 ; U12.9 3390.94,3169.06 3360,3200 ; U12.3 3675.63,3149.37 3685,3140 3685,3065 3705,3045 3705,2990 ; U12.2 3695.94,3169.06 3700,3165 3700,3115 3735,3080 3735,2990 ; R60.2 4049.17,3400.83 4049.17,3321.83 4108,3263 4218,3263 4230,3251 4230,3051.18
  Bottom Layer w20: K3.3 3230,2910 3245,2895 3245,2860 3265,2840 3365,2840 3455,2930 3625,2930 3640,2945 C40.1 ; U15.3 3510,3555 3550,3515 v1(3550,3440) ; C38.1 3770,2990 ; C42.2 3730,3380 v1(3700,3350) 3655,3350 3570,3265 3570,3080 3640,3010 C40.1 ; R63.1 4329.84,3070 INP6.1 4230,3051.18 4168.82,2990 3770,2990 ; C40.1 3705,2990 3735,2990 3770,2990
IL1+: C15.1 R21.1 U2.7
IL1-: C16.1 R26.1 U2.8
IL2+: C11.1 R15.1 U2.9
IL2-: C14.1 R20.1 U2.12
IL3+: C7.1 R8.1 U2.13
IL3-: C8.1 R14.1 U2.14
ILN+: C1.1 R1.1 U2.15
ILN-: C6.1 R6.1 U2.16
IRQ0_I: R7.1 U1.15 U2.29
IRQ1_I: R11.1 U2.32
KEY1: C44.1 P3.1 R66.1 U19.17 | length 171.7
  Bottom Layer w10: C44.1 3565,135.79 P3.1 3562.99,222.99 R66.1
KEY2: C45.1 P3.2 R74.1 U19.21 | length 175.3
  Bottom Layer w10: C45.1 3650,126.38 P3.2 3661.42,223.58 R74.1
KEY3: C47.1 P3.3 R75.1 U19.22 | length 184.6
  Bottom Layer w10: R75.1 3759.84,224.84 P3.3 3795,102.64 C47.1
KEY4: C48.1 P3.4 R69.1 U19.23 | length 209.6
  Bottom Layer w10: R69.1@3855,225 3858.27,221.73 P3.4 3862.2,137.8 C48.1
LCD_D4: L13.1 U19.26
LCD_D5: L14.2 U19.38
LCD_D6: L15.1 U19.36
LCD_D7: L16.2 U19.33
LCD_E: L12.2 U19.25
LCD_K: P1.12 R89.1 R90.1 | length 301.5
  Bottom Layer w20: P1.12 2544.33,3511.29 2559.33,3496.29 R90.1 2659.42,3399.25 R89.1
LCD_RS: L10.2 U19.24
LCD_RW: L11.1 U19.30
LCD_VO: P1.3 R87.1 R88.1 | length 216.6
  Bottom Layer w10: R88.1 R87.1 2084.33,3384.25 2084.33,3484.25 P1.3
LED1: R81.2 U19.40
LED2: R82.2 U19.41
MDB_DE: U19.51
MDB_RX: U19.53
MDB_TX: U19.52
MISO_I: U1.13 U2.37
MOSI_I: U1.17 U2.38
NetB1_2: B1.2 R76.1
NetC2_2: C2.2 C3.2 U2.5
NetC4_2: C4.2 C5.2 U2.24
NetC9_2: C9.2 U2.27 X1.1
NetC10_2: C10.2 U2.28 X1.3
NetC12_2: C12.2 C13.2 U2.17
NetC29_1: C29.1 DAC1.2 R43.2 U5.6 | length 609.1
  Bottom Layer w10: C29.1 R43.2 4080,2013.74 ; U5.6 4080,2013.74 ; 4221.5,2013.74 4255,2047.24 ; DAC1.2 4255,2047.24 ; 4080,2013.74 4124.41,1969.33 4177.09,1969.33 4255,2047.24
NetC29_2: C29.2 R43.1 R44.2 U5.2 | length 551.9
  Bottom Layer w10: R44.2 3855,2073.74 ; R43.1 C29.2 3855,2073.74 ; U5.2 4130,1923.74 4080,1973.74 3870,1973.74 3860,1983.74 3860,2068.74 3855,2073.74
NetC30_1: C30.1 DAC2.2 R46.2 U6.6 | length 561.7
  Bottom Layer w10: C30.1 R46.2 4080,1659.41 ; U6.6 4080,1659.41 ; DAC2.2 4255,1692.91 4177.09,1615 4124.41,1615 4080,1659.41
NetC30_2: C30.2 R46.1 R47.2 U6.2 | length 551.9
  Bottom Layer w10: R47.2 3855,1719.41 ; R46.1 C30.2 3855,1719.41 ; U6.2 4130,1569.41 4080,1619.41 3870,1619.41 3860,1629.41 3860,1714.41 3855,1719.41
NetC31_1: C31.1 DAC3.2 R49.2 U7.6 | length 609.1
  Bottom Layer w10: C31.1 R49.2 4080,1305.08 ; U7.6 4080,1305.08 ; 4221.5,1305.08 4255,1338.58 ; DAC3.2 4255,1338.58 ; 4080,1305.08 4124.41,1260.67 4177.09,1260.67 4255,1338.58
NetC31_2: C31.2 R49.1 R50.2 U7.2 | length 551.9
  Bottom Layer w10: R50.2 3855,1365.08 ; R49.1 C31.2 3855,1365.08 ; U7.2 4130,1215.08 4080,1265.08 3870,1265.08 3860,1275.08 3860,1360.08 3855,1365.08
NetC36_1: C36.1 R59.2 R60.1 U14.2 | length 352.3
  Bottom Layer w10: R60.1 C36.1 R59.2 4015,3200 4045,3170 U14.2
NetC36_2: C36.2 R59.1 U12.1 U14.6 | length 614.3
  Bottom Layer w10: U12.1 3706.26,3188.74 3725,3170 3725,3135 3740,3120 U14.6 3935,3120 3955,3140 R59.1 C36.2
NetC41_1: C41.1 U15.4 | length 158.3
  Bottom Layer w20: C41.1 3312.09,3605 U15.4
NetC41_2: C41.2 U15.2 | length 217.3
  Bottom Layer w20: C41.2 3280,3415 3370,3505 U15.2
NetC51_2: C51.2 C55.2 L9.2 R84.1 ZZ1.1
NetC53_2: C53.2 R84.2 R86.1 U17.4
NetC66_1: C66.1 L9.1 U17.2
NetC66_2: C66.2 U17.6
NetC68_1: C68.1 U20.4
NetC68_2: C68.2 U20.2
NetCPU_ERR1_K: CPU_ERR1.K R82.1
NetCPU_OK1_K: CPU_OK1.K R81.1
NetD4_A: D4.A Z6.1
NetF1_2: F1.2 R1.2 R2.1 R3.1
NetF2_2: F2.2 R4.1 R5.1 R6.2
NetF3_2: F3.2 R8.2 R9.1 R10.1
NetF4_2: F4.2 R12.1 R13.1 R14.2
NetF5_2: F5.2 R15.2 R16.1 R17.1
NetF6_2: F6.2 R18.1 R19.1 R20.2
NetF7_2: F7.2 R21.2 R22.1 R23.1
NetF8_2: F8.2 R24.1 R25.1 R26.2
NetF9_1: F9.1 Z2.7 | length 111.9
  Bottom Layer w20: Z2.7 182.56,472.44 F9.1
NetF9_2: F9.2 R29.2 | length 436.5
  Bottom Layer w20: F9.2 290,376.35 389.65,276.71 389.65,174.35 424,140 R29.2
NetF10_1: F10.1 Z2.5 | length 145.1
  Bottom Layer w20: Z2.5 142.21,669.29 230,581.5 F10.1
NetF11_1: F11.1 Z2.3 | length 134.6
  Bottom Layer w20: Z2.3 178.86,866.14 F11.1
NetF12_1: F12.1 Z2.1 | length 90.2
  Bottom Layer w20: Z2.1 F12.1@227.99,1062.99
NetFX1_1: FX1.1 U2.35
NetFX2_1: FX2.1 U2.34
NetINP4_1: INP4.1 R58.2 | length 148.4
  Bottom Layer w10: R58.2 4290,2665 4311.02,2686.02 INP4.1
NetINP4_2: INP4.2 R57.2 | length 103.6
  Bottom Layer w10: R57.2 4280.67,2865 INP4.2
NetINP5_1: INP5.1 U9.4 | length 94.9
  Bottom Layer w10: U9.4 4289.53,2441.18 INP5.1
NetINP5_2: INP5.2 U9.5 | length 369.7
  Bottom Layer w10: U9.5 4249.41,2415.59 4260,2405 4260,2365 4270,2355 4355,2355 4365,2365 4365,2465.71 INP5.2
NetINP6_2: INP6.2 R62.2 R63.2 | length 197.7
  Bottom Layer w10: R62.2 4260,3202.2 INP6.2
  Bottom Layer w20: INP6.2 4383.82,3151.18 R63.2
NetJ1_1: J1.1 R41.1
NetJ1_2: J1.2 R42.2
NetL1_2: L1.2 U16.1
NetL2_2: L2.2 U16.2
NetL3_2: L3.2 U16.3
NetL4_2: L4.2 U16.4
NetL5_2: L5.2 U16.5
NetL6_2: L6.2 U16.6
NetL7_2: L7.2 U16.7
NetL8_2: L8.2 U16.8
NetL10_1: L10.1 P1.4 | length 192.4
  Bottom Layer w10: L10.1 2144.33,3444.25 P1.4
NetL11_2: L11.2 P1.5 | length 88.3
  Bottom Layer w10: L11.2 2174.33,3474.25 P1.5
NetL12_1: L12.1 P1.6 | length 184.1
  Bottom Layer w10: L12.1 2234.33,3444.25 2244.33,3454.25 P1.6
NetL13_2: L13.2 P1.7 | length 80
  Bottom Layer w10: L13.2 P1.7
NetL14_1: L14.1 P1.8 | length 184.1
  Bottom Layer w10: P1.8 2344.33,3459.25 2354.33,3449.25 L14.1
NetL15_2: L15.2 P1.9 | length 88.3
  Bottom Layer w10: P1.9 2394.33,3434.25 L15.2
NetL16_1: L16.1 P1.10 | length 192.4
  Bottom Layer w10: P1.10 2444.33,3444.25 L16.1
NetP2_3: P2.3 R91.1
NetP2_4: P2.4 R92.1
NetP2_5: P2.5 R93.1
NetQ1_B: Q1.B R77.1 R78.1
NetQ1_C: Q1.C R76.2
NetR27_2: R27.2 R28.1 | length 100
  Bottom Layer w20: R28.1 R27.2
NetR28_2: R28.2 R29.1 | length 100
  Bottom Layer w20: R29.1 R28.2
NetR31_2: R31.2 R32.1 | length 100
  Bottom Layer w20: R32.1 R31.2
NetR32_2: R32.2 R33.1 | length 100
  Bottom Layer w20: R33.1 R32.2
NetR35_2: R35.2 R36.1 | length 100
  Bottom Layer w20: R36.1 R35.2
NetR36_2: R36.2 R37.1 | length 100.2
  Bottom Layer w20: R37.1 754.79,569.79 R36.2
NetR40_1: R40.1 U4.8 | length 90
  Bottom Layer w10: R40.1 U4.8
NetR45_2: R45.2 U5.3 | length 225.7
  Bottom Layer w10: R45.2 3965,1948.74 4065,1948.74 4080,1933.74 U5.3
NetR48_2: R48.2 U6.3 | length 225.7
  Bottom Layer w10: R48.2 3965,1594.41 4065,1594.41 4080,1579.41 U6.3
NetR51_2: R51.2 U7.3 | length 225.7
  Bottom Layer w10: R51.2 3965,1240.08 4065,1240.08 4080,1225.08 U7.3
NetR62_1: R62.1 U14.3 | length 186.6
  Bottom Layer w10: U14.3 4160,3120 4200,3160 R62.1
NetR65_1: R65.1 X2.3
NetR67_2: R67.2 X2.1
NetR71_1: R71.1 R73.1 Z4.2
NetR72_1: R72.1 Z4.3
NetR83_2: R83.2 R85.1 U17.5
NetR95_1: R95.1 ZAS1.K
PK1: L1.1 U19.2
PK2: L2.1 U19.3
PK3: L3.1 U19.4
PK4: L4.1 U19.6
PK5: L5.1 U19.8
PK6: L6.1 U19.9
PK7: L7.1 U19.10
PK8: L8.1 U19.11
PM1: U16.18 Z5.7
PM2: U16.17 Z5.8
PM3: U16.16 Z5.9
PM4: U16.15 Z5.10
PM5: U16.14 Z5.11
PM6: U16.13 Z5.12
PM7: U16.12 Z5.13
PM8: U16.11 Z5.14
REF2I1: R52.1 R56.1 U8.5 U9.1 | length 483
  Bottom Layer w10: R52.1 3990,2320 4100,2320 4138.39,2358.39 U9.1 4170,2390 4170,2501.83 4122.91,2548.91 U8.5
RES1: C50.1 INP12.2 R80.1 U19.13
RES2: C65.1 INP7.2 R94.1 U19.14
SCL: R54.2 U10.3 U11.3 U13.6 U19.43
SCLI1: U8.8 U10.6 | length 178.5
  Bottom Layer w10: U10.6 3825,2665 3869.69,2620.31 U8.8
SCLI2: U11.6 U12.8 | length 140.3
  Bottom Layer w10: U11.6 3300.63,3149.37 U12.8
SCLK_I: U1.18 U2.36
SDA: R53.2 U10.2 U11.2 U13.5 U19.42
SDAI1: R55.1 U8.7 U10.7 | length 447.6
  Bottom Layer w10: U10.7 3845,2615 3859.37,2600.63 U8.7 3980.63,2600.63 3990,2610 3990,2675 3970,2695 3895,2695 R55.1
SDAI2: R61.1 U11.7 U12.7 | length 399.4
  Bottom Layer w10: U11.7 3350,3100 3379.69,3129.69 U12.7 3489.69,3129.69 3500,3140 3500,3225 3485,3240 3465,3240 R61.1
ST_GEN: R65.2 U19.5
SWCLK: R68.2 SWD1.3 U19.50
SWDIO: R64.2 SWD1.1 U19.49
TERMIK: C49.1 INP11.2 R79.1 U19.12
UL1: C27.2 R35.1 R38.2 U2.23 | length 195.4
  Bottom Layer w20: R35.1 R38.2 1230,515 C27.2
UL1Z: F11.2 R37.2 | length 345.4
  Bottom Layer w20: F11.2 326,740 496.21,569.79 R37.2
UL2: C26.2 R31.1 R34.2 U2.22 | length 200.4
  Bottom Layer w20: R31.1 R34.2 1230,290 C26.2
UL2Z: F10.2 R33.2 | length 319.1
  Bottom Layer w20: F10.2 505,350 R33.2
UL3: C25.2 R27.1 R30.2 U2.19 | length 195.4
  Bottom Layer w20: R27.1 R30.2 1230,85 C25.2
ULN: C25.1 C26.1 C27.1 C28.2 F12.2 R30.1 R34.1 R38.1 R39.2 U2.18 | length 1976.8
  Bottom Layer w20: F12.2 288,901 494,695 R39.2 ; C28.2 1225,775 1225,650 1250,625 1315,625 R38.1 C27.1 R34.1 C26.1 R30.1 C25.1
USB_DM: U19.45
USB_DP: U19.46
VC3: C32.2 C37.2 C43.2 C52.2 C58.1 C59.1 C60.1 C61.1 C62.1 C63.1 CPU_ERR1.A CPU_OK1.A L17.1 R53.1 R54.1 R64.1 R66.2 R67.1 R69.2 R70.1 R71.2 R74.2 R75.2 R79.2 R80.2 R94.2 SWD1.4 U1.1 U1.7 U10.1 U11.1 U13.8 U18.2 U18.4 U19.16 U19.32 U19.48 U19.64 X2.4 ZAS1.A | length 603.5
  Bottom Layer w10: U11.1 3120,3050 3135,3065 3135,3240 C37.2 ; U10.1 3605,2565 3615,2575 3615,2750 C32.2
VC3_I: C17.2 C18.2 C19.2 C20.2 C21.2 C22.2 C23.2 C24.2 R7.2 R11.2 U1.14 U1.20 U2.2 U2.26 U3.2
VC5: B1.1 C54.2 P1.2 P1.11 P2.1 R87.2 U4.3 U18.3 Z5.1 Z5.2 ZZ1.2 | length 184.1
  Bottom Layer w10: P1.2 2044.33,3459.25 2054.33,3449.25 R87.2
VC5_I: K1.4 U3.3
VC5I1: C33.2 C34.2 C35.2 C67.2 D2.2 D3.2 K2.4 R52.2 R55.2 U8.6 U9.3 U10.8 | length 2451.4
  Top Layer w10: K2.4 3870,2525 v3(4040,2525)
  Bottom Layer w10: R55.2 3860,2787.5 3888.75,2758.75 3888.75,2741.25 3915,2715 3975.46,2715 4010,2680.46 4010,2595 3995.94,2580.94 U8.6 3870.94,2580.94 3855,2565 U10.8 ; R52.2 3945,2425 3925,2445 C34.2 3885,2475 3860,2450 K2.4 3795,2510 3780,2525 3780,2555 U10.8 ; D2.2 4017,2898 4015,2900 ; v3(4040,2525) 4105,2525 4138.39,2491.61 U9.3 4137.2,2440 4105,2440 4095,2450 C67.2 ; D3.2 4112,2900 4015,2900 ; U10.8 3720,2565 3700,2585 3700,2770 C33.2 3725,2870 3755,2900 4015,2900
  Bottom Layer w20: K2.4 3840,2405 C35.2
VC5I2: C38.2 C39.2 C40.2 K3.4 R61.2 U11.8 U12.6 U14.7 U15.8 | length 1482.5
  Top Layer w20: v1(3600,3360) v1(3670,3290)
  Bottom Layer w10: U11.8 3370,3050 3400,3020 3400,2990 ; U12.6 3529.76,3110 ; R61.2 3529.76,3280 ; C39.2 3524.53,3340 3529.76,3334.76
  Bottom Layer w20: K3.4 3400,2990 C40.2 3529.76,3110 3529.76,3280 3529.76,3334.76 3529.76,3349.76 3540,3360 v1(3600,3360) 3605,3360 3650,3405 U15.8 ; v1(3670,3290) 3790,3170 ; C38.2 3790,3170 ; U14.7 3790,3170
VC12: C56.2 C57.2 D4.K K1.2 K2.2 K3.2 R83.1 U5.7 U6.7 U7.7 U16.10 U17.3 U20.8 Z3.4 Z5.5 Z5.6 | length 6699.6
  Top Layer w40: 2516,221 2519,218 3899,218 4227,546 4227,703.38 Z3.4 4311.02,1079.98 4150,1241 v1(4150,1305.67) v1(4150,1660) v1(4150,2014.33) 4150,2155 4130,2175 3625,2175 3580,2220 3580,2695 3517,2758 3170,2758 3117,2811 K3.2@3117,2907 ; 2655,3619 3077,3619 3117,3579 K3.2@3117,2907 ; K3.2 K3.2@3117,2907
  Bottom Layer w40: U7.7 4130,1325.67 v1(4150,1305.67) ; U6.7 4130,1680 v1(4150,1660) ; U5.7 4130,2034.33 v1(4150,2014.33)
VDDA: C64.1 L17.2 U19.28 U19.29
VM5I2: C42.1 U14.4 U15.5 | length 1008.4
  Top Layer w20: v1(3930,3570) 3930,3473 4180,3223 v1(4180,3070)
  Bottom Layer w20: U15.5 3767.91,3605 C42.1 ; C42.1@3782.09,3555 C42.1 ; v1(3930,3570) 3802.91,3570 C42.1 ; U14.4 v1(4180,3070)
VM12: C69.1 R96.2 U5.4 U6.4 U7.4 U20.5
pads on no net: P1.0 RESET1.0 U2.1 U2.10 U2.11 U2.20 U2.21 U2.30 U2.31 U2.40 U4.5 U5.1 U5.5 U5.8 U6.1 U6.5 U6.8 U7.1 U7.5 U7.8 U13.7 U19. U19.1 U20.1 U20.6 U20.7 X1.2 X1.4 Z2.2 Z2.4 Z2.6 Z5.0

## Polygon pours and split planes (outlines as drawn)
GNDI1 on Top Layer "P_GNDI1" (solid, remove dead copper, pour order 2): 4450,2275 3675,2275 3675,2835 3700,2860 3745,2905 3765,2905 4450,2905
GNDI2 on Top Layer "P_GNDI2" (solid, remove dead copper, pour order 4): 4445,2975 3700,2975 3620,2895 3455,2895 3450,2895 3395,2840 3210,2840 3210,3660 4450,3660

## Silkscreen, mask and mechanical layers (free items; w line width, h text height)
Mechanical 1:
  the board outline again, w7.87

## Text inside footprints (layer, text, board x,y; h text height)
K1: Top Overlay "-" at 1490,1070 h45; Top Overlay "+" at 1345,1080 h45; Top Overlay "+" at 1585,1065 h45; Top Overlay "-" at 1700,1070 h45; Top Overlay "INP" at 1720.83,1058.78 h45 r180; Top Overlay "OUT" at 1500.35,1064.68 h45 r180
K2: Top Overlay "-" at 3715,2550 h45 r180; Top Overlay "+" at 3860,2540 h45 r180; Top Overlay "+" at 3620,2555 h45 r180; Top Overlay "-" at 3505,2550 h45 r180; Top Overlay "INP" at 3484.17,2561.22 h45; Top Overlay "OUT" at 3704.65,2555.32 h45
K3: Top Overlay "-" at 3250,3020 h45 r180; Top Overlay "+" at 3395,3010 h45 r180; Top Overlay "+" at 3155,3025 h45 r180; Top Overlay "-" at 3040,3020 h45 r180; Top Overlay "INP" at 3019.17,3031.22 h45; Top Overlay "OUT" at 3239.65,3025.31 h45
U1: Bottom Overlay "1" at 1646.69,1621.5 h45 r90
U9: Bottom Overlay "1" at 4122.64,2338.82 h45 r270
U19: Bottom Overlay "1" at 2967.09,1336.38 h45